# EAGLE board e44 (EAGLE 9.5.2)
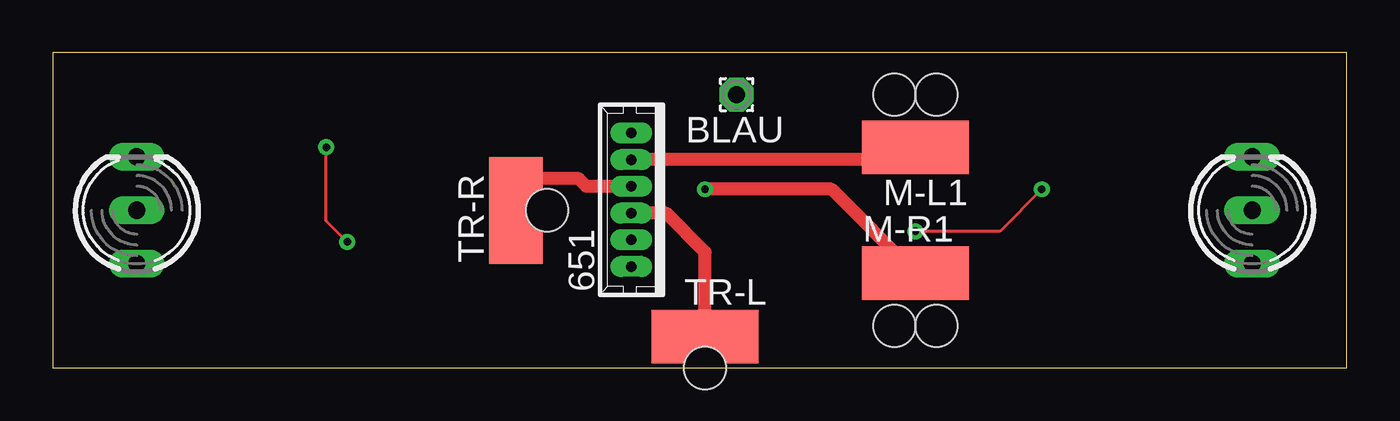
[diagram p0: board, top side]
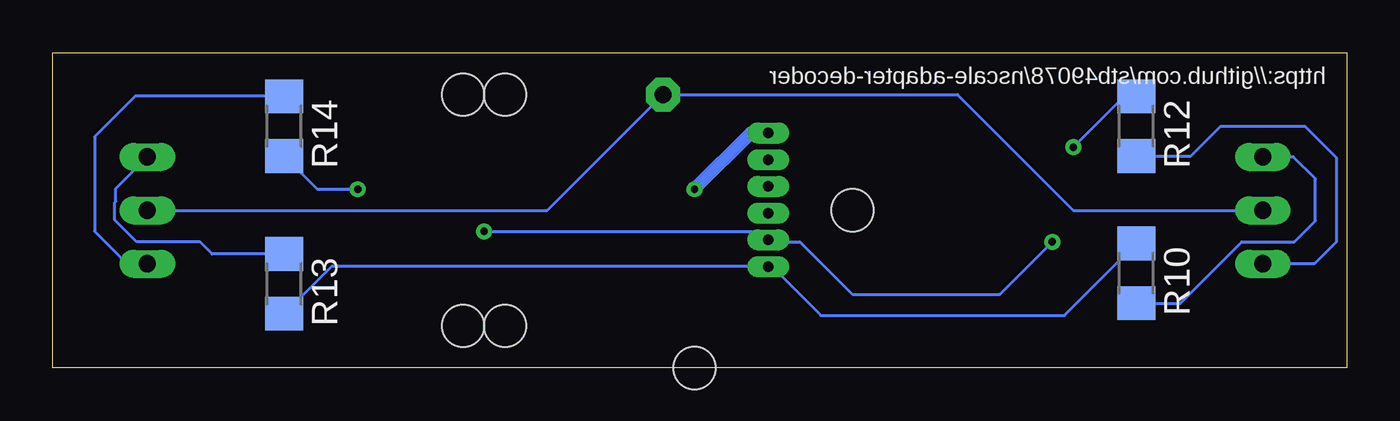
[diagram p1: board, bottom side, seen from below]

Size 61.5 x 15 mm. Coordinates in mm from the lower left corner, seen from the top.
Outline: 0,0 61.5,0 61.5,15 0,15 0,0
Copper layers (1*16): Top 0.035mm / dielectric 1.5mm / Bottom 0.035mm
Design rules "default *": minimum track width 6mil, minimum drill 0.35mm, track to track 6mil, track to pad 6mil, pad to pad 6mil, via to via 6mil, smd to smd 6mil, copper to edge 6mil, drill to drill 6mil, minimum pad ring 10mil, minimum via ring 8mil, stop-mask expansion 4mil, vias tented up to drill 0mil, thermal gap 10mil
Holes 2 mm at 23.5,7.5 31,0 40,2 42,2 40,13 42,13

## Footprints (pad centres in the part's own frame; a part is rotated, then mirrored left to right if it is on the bottom)
53047-06 = drill 0.5 pad 0.698 long: 1 3.175,0; 2 1.905,0; 3 0.635,0; 4 -0.635,0; 5 -1.905,0; 6 -3.175,0
1,6/0,8 = drill 0.813 pad 1.6 octagon: 1 0,0
DUOLED-A-5MM = drill 0.813 long: A 0,0; CR 2.54,0; CX -2.54,0
SMD2,54-5,08 = smd 2.54 x 5.08: 1 0,0
R1206 = smd 1.6 x 1.803: 1 -1.422,0; 2 1.422,0

## Placement (x,y rotation side)
651  NEM_651-TS  [53047-06]  27.5,8 90 top
BLAU  [1,6/0,8]  32.5,13 180 top
LED_F  [DUOLED-A-5MM]  57,7.5 90 top
LED_R  [DUOLED-A-5MM]  4,7.5 90 top
M-L1  [SMD2,54-5,08]  41,10.5 90 top
M-R1  [SMD2,54-5,08]  41,4.5 270 top
R10  [R1206]  10,4.5 270 bottom
R12  [R1206]  10,11.5 270 bottom
R13  [R1206]  50.5,4 270 bottom
R14  [R1206]  50.5,11.5 270 bottom
TR-L  [SMD2,54-5,08]  31,1.5 90 top
TR-R  [SMD2,54-5,08]  22,7.5 0 top

## Library data of the parts
651 = con-nem
BLAU M-L1 M-R1 TR-L TR-R = wirepad
LED_F LED_R = led
R10 R12-R14 = rcl; SPICEPREFIX: R

## Nets
N$2: BLAU.1 LED_F.A LED_R.A
N$4: 651.4 TR-L.1
N$11: 651.3 TR-R.1
N$13: 651.5 R12.1 R14.2
N$15: LED_R.CR R10.2
N$16: LED_R.CX R12.2
N$17: 651.6 R10.1 R13.2
N$18: LED_F.CR R13.1
N$19: LED_F.CX R14.1
N$20: 651.1 M-R1.1
N$21: 651.2 M-L1.1

## Tracks (layer width: path | path; a pad name or v marks a point on that pad's centre or on a via)
N$2
  Bottom 0.152: LED_F.A 38,7.5 BLAU.1 18.5,13 13,7.5 LED_R.A
N$4
  Top 0.61: TR-L.1 31,5.5 29.14,7.37 651.4
N$11
  Top 0.61: 651.3 25.36,8.63 25,9 22.5,9 22,8.5 TR-R.1
N$13  (via drill 0.35)
  Top 0.152: v47,8.5 45,6.5 v41,6.5 | v14,6 13,7 v13,10.5
  Bottom 0.152: R14.2 48.92,8.5 v47,8.5 | v41,6.5 27.91,6.5 651.5 27.41,6 26,6 23.5,3.5 16.5,3.5 v14,6 | v13,10.5 10.58,12.92 R12.1
N$15
  Bottom 0.152: R10.2 7.92,3.08 5,6 2.5,6 1.5,7 1.5,9 2.54,10.04 LED_R.CR
N$16
  Bottom 0.152: R12.2 7.42,10.08 6,11.5 2,11.5 0.5,10 0.5,6 1.54,4.96 LED_R.CX
N$17
  Bottom 0.152: R13.2 48.25,4.83 651.6 27.32,4.83 25,2.5 13.42,2.5 R10.1
N$18
  Bottom 0.152: R13.1 53.92,5.42 54.5,6 57.5,6 58.55,7.05 58.55,7.87 58.5,7.92 58.5,8.54 LED_F.CR
N$19
  Bottom 0.152: R14.1 57.58,12.92 59.5,11 59.5,6.5 57.96,4.96 LED_F.CX
N$20  (via drill 0.35)
  Top 0.61: M-R1.1 37,8.5 v31,8.5
  Bottom 0.61: v31,8.5 28.32,11.18 651.1
N$21
  Top 0.61: M-L1.1 40.41,9.9 651.2

## Text on the board
bNames: https://github.com/stb49078/nscale-adapter-decoder